# Altium PCB Main.PcbDoc
Units mm, origin at the board's own origin, x right, y up, seen from the top; angles counter-clockwise.
Board outline 98 x 90 mm, 2 copper layers (Top Layer, Bottom Layer); 6 components, 40 nets, 101 pads, 12 vias.
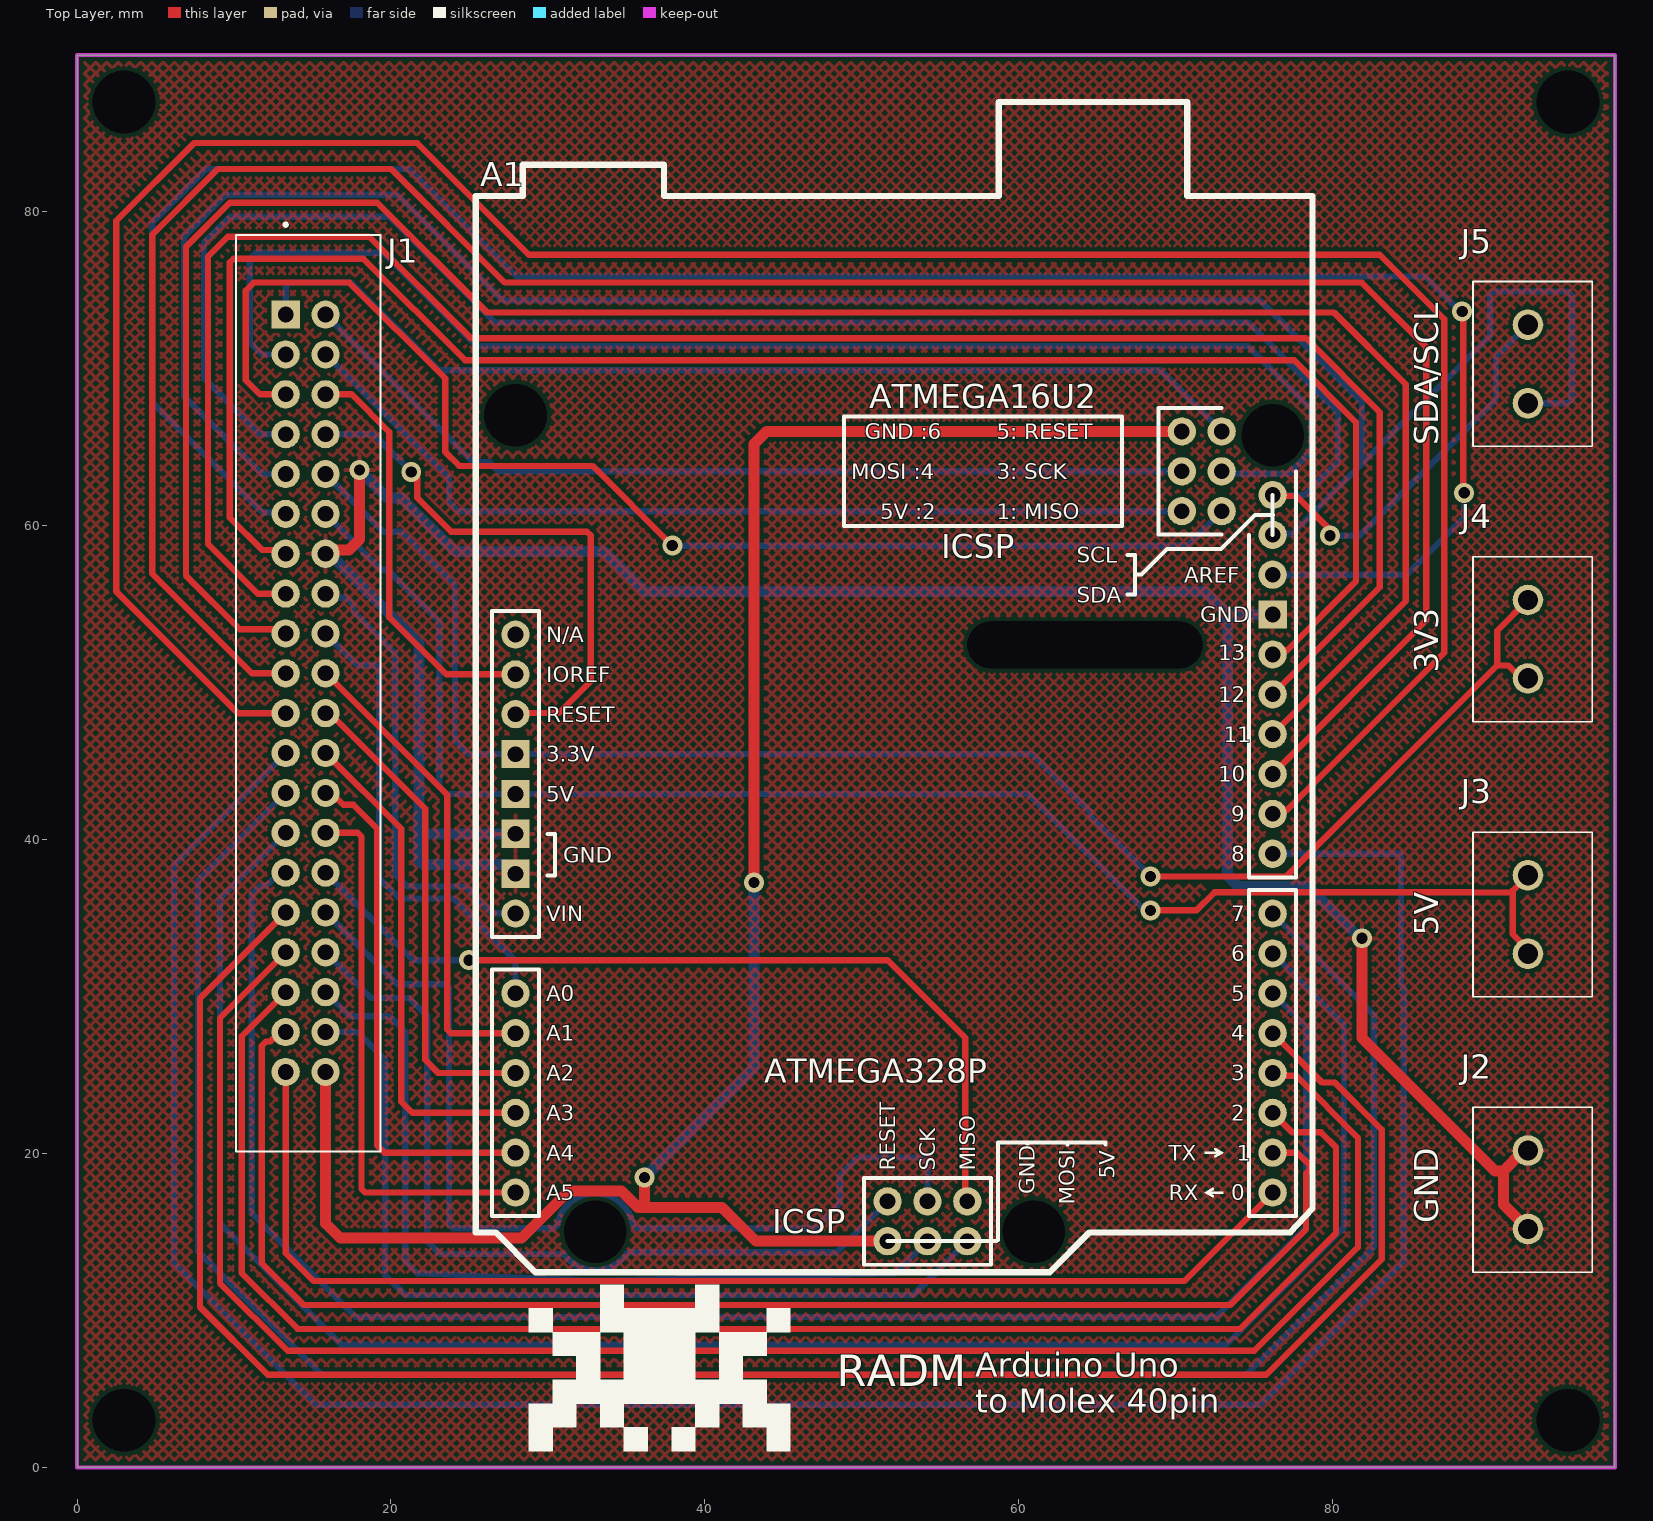
[diagram p0: Top Layer view]
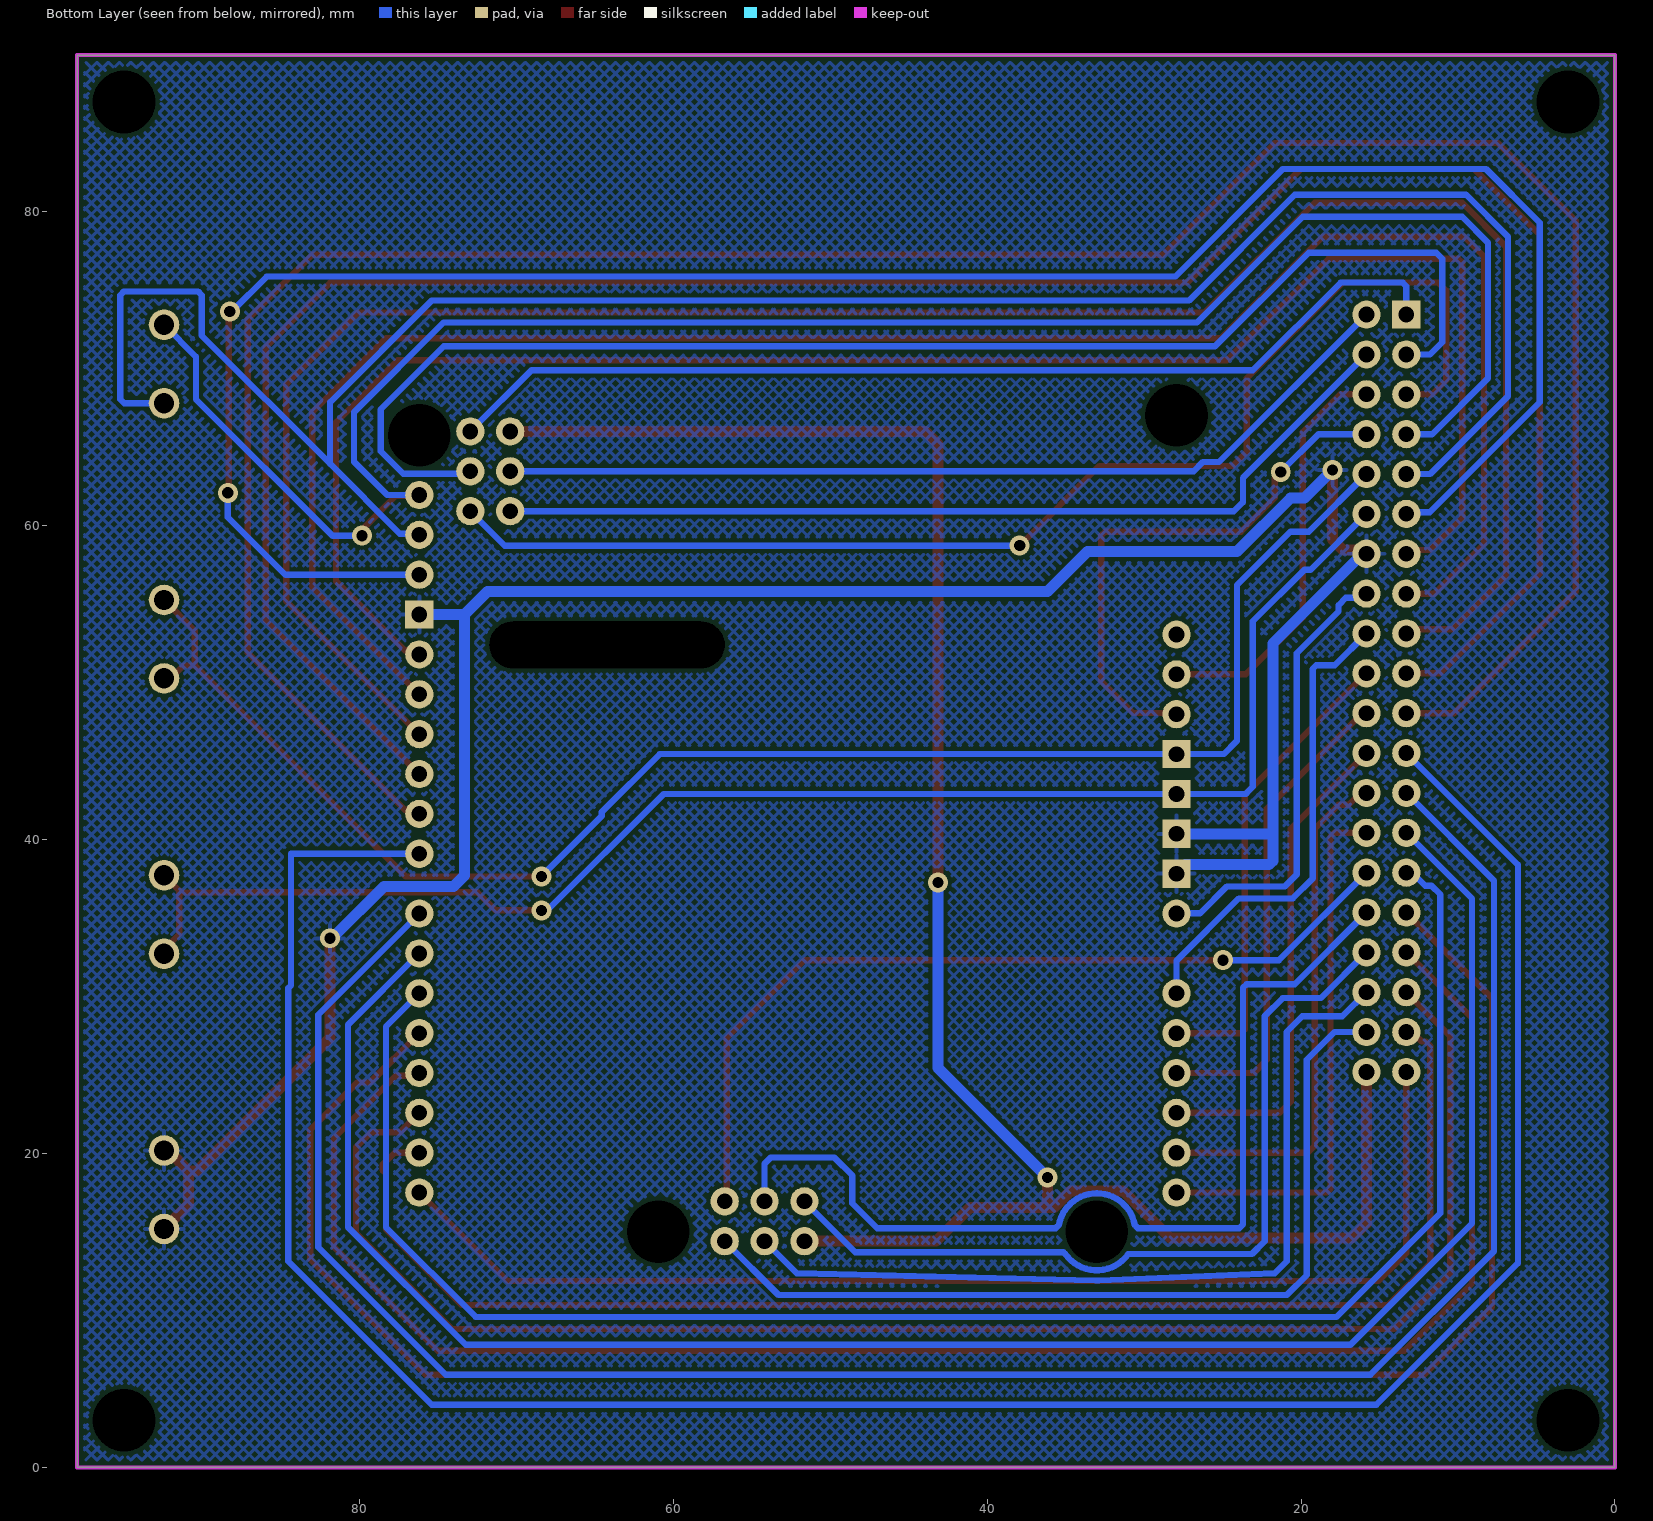
[diagram p1: Bottom Layer view, seen from below]

## Layer stack, top to bottom
Top Solder: solder mask 0.0102, Solder Resist, Dk 3.5
Top Layer: signal copper 0.0356
Dielectric 1: dielectric 0.32, FR-4, Dk 4.8
Bottom Layer: signal copper 0.0356
Bottom Solder: solder mask 0.0102, Solder Resist, Dk 3.5

## Board outline
0,0 98,0 98,90 0,90

## Design rules (kind name [scope] priority, off if disabled: settings)
Clearance [All] p1: gap=0.254 ignorepadtopadclearanceinfootprint=FALSE except(0: Arc-Hole Track-Hole SMDPad-Hole THPad-Hole Via-Hole Fill-Hole Poly-Hole Region-Hole Text-Hole)
PolygonConnect [All] p1: connectstyle=Relief reliefconductorwidth=0.254 reliefentries=4 polygonreliefangle="90 Angle" airgapwidth=0.254
RoutingVias [All] p1: holewidth=0.711 width=1.27 viastyle="Through Hole" minholewidth=0.711 minwidth=1.27 maxholewidth=0.711 maxwidth=1.27
SolderMaskExpansion [All] p1: expansion=0.102 istentingtop=FALSE
Width [All] p1: maxlimit=0.8 minlimit=0.4 preferedwidth=0.4
30 further rules are at their usual default settings.

## Components (designator, comment, footprint, x,y, rotation, side; value= is the part's Value field where it differs from the comment)
A1 "Arduino Uno" "Arduino Uno" 25.399,81.014 r0 top
J1 "1-1761681-3" TE_1-1761681-3 13.295,73.461 r270 top
J2 "TB002-500-02BE" TB00250002BE 92.456,20.193 r270 top
J3 "TB002-500-02BE" TB00250002BE 92.456,37.735 r270 top
J4 "TB002-500-02BE" TB00250002BE 92.456,55.276 r270 top
J5 "TB002-500-02BE" TB00250002BE 92.456,72.818 r270 top

## Footprints (in the part's own frame and the unit in brackets; to place one, negate y for a bottom-side part, rotate by r counter-clockwise, add the part's x,y. Pads: shape width x height; smd on the part's side, far side on the other; paste and mask are expansions set on the pad)
"Arduino Uno" [mm]
  round 1.8 hole 1: 0(50.79,-63.5) 1(50.79,-60.96) 2(50.79,-58.42) 3(50.79,-55.88) 4(50.79,-53.34) 5(50.79,-50.8) 6(50.79,-48.26) 7(50.79,-45.72) 8(50.79,-41.91) 9(50.79,-39.37) 10(50.79,-36.83) 11(50.79,-34.29) 12(50.79,-31.75) 13(50.79,-29.21) 200(26.25,-66.6) 201(26.25,-64.06) 202(28.79,-66.6) 203(28.79,-64.06) 204(31.33,-66.6) 205(31.33,-64.06) 300(45,-15) 301(47.54,-15) 302(45,-17.54) 303(47.54,-17.54) 304(45,-20.08) 305(47.54,-20.08) A0(2.54,-50.8) A1(2.54,-53.34) A2(2.54,-55.88) A3(2.54,-58.42) A4(2.54,-60.96) A5(2.54,-63.5) AREF(50.79,-24.13) IOREF(2.54,-30.48) N/A(2.54,-27.94) RESET(2.54,-33.02) SCL(50.79,-19.05) SDA(50.79,-21.59) VIN(2.54,-45.72)
  rect 1.8x1.8 hole 1: 3V3(2.54,-35.56) 5V(2.54,-38.1) GND1(2.54,-40.64) GND2(2.54,-43.18) GND3(50.79,-26.67)
  round 1.524 hole 4 unplated: 211(2.54,-13.97) 211(7.62,-66) 211(35.56,-66) 211(50.8,-15.24)
  oval 14x1.524 hole 3 slot 15 at 0 deg unplated: LED(38.83,-28.6)
  silkscreen extent 0,-68.58 53.33,6
TB00250002BE [mm]
  round 1.95 hole 1.3: 1(0,0) 2(5,0)
  silkscreen extent -2.75,-3.5 7.75,4.1, body extent -2.51,-4.08 7.99,3.52, height 9.99
TE_1-1761681-3 [mm]
  rect 1.8x1.8 hole 1: 1(0,0)
  round 1.8 hole 1: 2(0,2.54) 3(2.54,0) 4(2.54,2.54) 5(5.08,0) 6(5.08,2.54) 7(7.62,0) 8(7.62,2.54) 9(10.16,0) 10(10.16,2.54) 11(12.7,0) 12(12.7,2.54) 13(15.24,0) 14(15.24,2.54) 15(17.78,0) 16(17.78,2.54) 17(20.32,0) 18(20.32,2.54) 19(22.86,0) 20(22.86,2.54) 21(25.4,0) 22(25.4,2.54) 23(27.94,0) 24(27.94,2.54) 25(30.48,0) 26(30.48,2.54) 27(33.02,0) 28(33.02,2.54) 29(35.56,0) 30(35.56,2.54) 31(38.1,0) 32(38.1,2.54) 33(40.64,0) 34(40.64,2.54) 35(43.18,0) 36(43.18,2.54) 37(45.72,0) 38(45.72,2.54) 39(48.26,0) 40(48.26,2.54)
  silkscreen extent -5.83,-3.18 53.34,6.04

## Part data
J1: "40 Pin Connector", Package=None, Availability=Unavailable, MP=1-1761681-3, Price=None
J2 J3 J4 J5: "Connector", Manufacturer_Name="CUI Devices", Mouser Part Number=490-TB002-500-02BE, Arrow Part Number=TB002-500-02BE, Arrow Price/Stock=https://www.arrow.com/en/products/tb002-500-02be/cui-devices?region=nac, Datasheet Link=https://eu.mouser.com/datasheet/2/670/tb002_500-1550579.pdf, Height=10.4mm, Manufacturer_Part_Number=TB002-500-02BE, Mouser Price/Stock=https://www.mouser.co.uk/ProductDetail/CUI-Devices/TB002-500-02BE?qs=vLWxofP3U2x9716kcgva%2Fw%3D%3D

## Free pads (board coordinates)
  round 1.524 hole 4 unplated: 2(3,3) 2(3,87) 2(95,3) 2(95,87)

## Via types
v1: diameter 1.27, hole 0.711, Top Layer to Bottom Layer, 12 vias

## Nets (pads, with @x,y where several pads share a name; then routed paths per layer and width w, separated by ;. In a path a pad name is that pad's centre, name@x,y a point inside that pad or via, vN(x,y) a via of type N, cw(c..) or ccw(c..) an arc to the next point about the centre after c; other vN are vias at no path point)
0: A1.0 J1.39 | length 77.5
  Top Layer w0.4: J1.39 13.295,13.652 15.073,11.874 70.549,11.874 A1.0
1: A1.1 J1.37 | length 92.2
  Top Layer w0.4: J1.37 12.916,27.741 12.318,27.143 12.054,27.143 11.771,26.86 11.771,13.017 14.438,10.35 73.493,10.35 78.319,15.176 78.319,18.732 78.534,18.947 78.534,19.279 77.759,20.054 A1.1
2: A1.2 J1.35 | length 103.2
  Top Layer w0.4: J1.35 10.501,27.487 10.501,12.382 14.057,8.826 74.128,8.826 80.224,14.922 80.224,20.403 79.262,21.364 77.419,21.364 A1.2
3: A1.3 J1.33 | length 114
  Top Layer w0.4: J1.33 9.104,28.63 9.104,11.747 13.422,7.429 75.017,7.429 81.621,14.033 81.621,21.018 77.689,24.95 76.373,24.95 A1.3
3V3: A1.3V3 J1.10 J4.1 J4.2 | length 104.1
  Top Layer w0.4: v1(68.413,37.655) 77.049,37.655 90.499,51.105 ; J4.2 92.037,50.276 91.207,51.105 90.499,51.105 ; J4.1 90.499,53.32 90.499,51.105
  Bottom Layer w0.4: J1.10 19.511,59.625 20.682,59.625 24.09,56.217 24.09,46.291 24.927,45.454 A1.3V3 60.868,45.454 64.557,41.765 64.557,41.511 v1(68.413,37.655)
4: A1.4 J1.31 | length 125.2
  Top Layer w0.4: 12.152,5.905 7.834,10.223 7.834,29.9 J1.31 ; 12.251,5.905 75.779,5.905 83.145,13.271 83.145,21.526 80.141,24.53 79.333,24.53 A1.4
5: A1.5 J1.29 | length 111.1
  Bottom Layer w0.4: J1.29 12.916,37.901 12.083,37.067 11.691,37.067 11.136,36.512 11.136,16.192 17.74,9.588 72.604,9.588 78.319,15.303 78.319,28.084 A1.5
5V: A1.5V J1.12 J3.1 J3.2 | length 98.5
  Top Layer w0.4: v1(68.413,35.496) 71.334,35.496 72.486,36.648 88.851,36.648 88.86,36.639 91.48,36.639 ; J3.2 92.456,33.01 91.48,33.986 91.48,36.639 ; J3.1 91.48,36.759 91.48,36.639
  Bottom Layer w0.4: J1.12@15.843,60.761 J1.12 19.394,57.202 19.783,57.202 23.074,53.911 23.074,43.37 23.329,43.115 23.53,42.914 A1.5V 60.614,42.914 v1@68.223,35.305
6: A1.6 J1.27 | length 123.9
  Bottom Layer w0.4: J1.27 9.104,36.25 9.104,15.557 16.851,7.81 73.239,7.81 80.732,15.303 80.732,28.211 A1.6
7: A1.7 J1.25 | length 137
  Bottom Layer w0.4: J1.25 7.707,37.393 7.707,13.779 15.581,5.905 74.509,5.905 82.637,14.033 82.637,28.846 A1.7
8: A1.8 J1.23 | length 155.7
  Bottom Layer w0.4: J1.23 6.183,38.409 6.183,13.017 15.2,4 75.398,4 84.542,13.144 84.542,30.543 84.363,30.722 84.363,39.104 A1.8 A1.8@76.189,38.896
9: A1.9 J1.21 | length 165.4
  Top Layer w0.4: J1.21 10.255,48.061 2.5,55.816 2.5,79.438 7.453,84.391 21.677,84.391 28.789,77.279 83.018,77.279 87.122,73.175 87.122,51.919 85.177,49.974 77.115,41.912 76.457,41.912 A1.9
10: A1.10 J1.19 | length 151.6
  Top Layer w0.4: J1.19 11.144,50.601 4.786,56.959 4.786,78.549 8.977,82.74 20.026,82.74 27.265,75.501 81.875,75.501 85.979,71.397 85.979,53.974 A1.10
11: A1.11 J1.17 | length 138.3
  Top Layer w0.4: J1.17 13.033,53.403 10.374,53.403 6.945,56.832 6.945,77.787 9.739,80.581 19.137,80.581 26.122,73.596 80.097,73.596 84.669,69.024 84.669,55.204 A1.11
12: A1.12 J1.15 | length 125.2
  Top Layer w0.4: J1.15 11.525,55.681 8.342,58.864 8.342,77.152 9.612,78.422 18.629,78.422 25.106,71.945 78.319,71.945 83.018,67.246 83.018,56.093 A1.12
13: A1.13 J1.13 | length 114.3
  Top Layer w0.4: J1.13 13.057,58.459 11.795,58.459 9.739,60.515 9.739,76.791 9.973,77.025 18.248,77.025 24.725,70.548 77.557,70.548 81.494,66.611 81.494,56.451 77.115,52.072 76.457,52.072 A1.13
201: A1.201 J1.34 | length 54.3
  Bottom Layer w0.4: J1.34 18.748,29.908 21.169,29.908 22.312,28.765 22.312,14.414 23.127,13.599 31.008,13.599 31.03,13.577 ccw(c33.019,15.014) 35.008,13.577 35.03,13.599 35.147,13.716 48.411,13.716 A1.201
202: A1.202 J1.36 | length 55.2
  Bottom Layer w0.4: J1.36 17.37,28.746 19.918,28.746 20.915,27.749 20.915,13.144 21.687,12.372 32.891,11.909 ccw(c33.019,15.014) 33.095,11.907 52.147,12.372 A1.202
203: A1.203 J1.32 | length 63.2
  Bottom Layer w0.4: J1.32 20.399,30.797 23.475,30.797 23.709,30.563 23.709,15.474 23.826,15.357 23.943,15.24 30.4,15.24 30.517,15.357 30.603,15.443 cw(c33.019,15.014) 35.435,15.443 35.521,15.357 35.638,15.24 47.014,15.24 48.601,16.827 48.601,18.605 49.744,19.748 53.808,19.748 54.189,19.367 A1.203
204: A1.204 J1.38 | length 57.3
  Bottom Layer w0.4: J1.38 17.875,27.741 19.645,25.971 19.645,12.255 20.915,10.985 53.3,10.985 A1.204
205: A1.205 J1.30 | length 55.6
  Top Layer w0.4: v1(24.979,32.321) 51.649,32.321 56.602,27.368 56.602,17.081 A1.205
  Bottom Layer w0.4: J1.30 21.415,32.321 v1(24.979,32.321)
301: A1.301 J1.1 | length 65.5
  Bottom Layer w0.4: J1.1 13.295,75.267 13.529,75.501 17.486,75.501 23.074,69.913 69.04,69.913 A1.301
302: A1.302 J1.2 | length 58.7
  Bottom Layer w0.4: J1.2 25.225,64.071 26.249,64.071 26.846,63.474 A1.302
303: A1.303 J1.3 | length 88.9
  Bottom Layer w0.4: J1.3 11.779,70.921 11.009,71.691 11.009,77.025 11.39,77.406 19.518,77.406 25.487,71.437 74.636,71.437 78.653,67.42 78.653,64.758 77.215,63.32 73.093,63.32 A1.303
304: A1.304 J1.4 | length 59.6
  Bottom Layer w0.4: J1.4 23.709,63.047 23.709,61.511 24.286,60.934 A1.304
305: A1.305 J1.5 | length 81.6
  Top Layer w0.4: J1.5 11.652,68.381 10.755,69.278 10.755,74.993 11.263,75.501 17.359,75.501 23.455,69.405 23.455,64.706 24.344,63.817 32.853,63.817 v1(37.933,58.737)
  Bottom Layer w0.4: v1(37.933,58.737) 70.742,58.737 A1.305
A0: A1.A0 J1.18 | length 30.6
  Bottom Layer w0.4: J1.18 17.859,51.117 19.03,51.117 19.264,50.883 19.264,37.528 20.534,36.258 23.963,36.258 27.939,32.282 A1.A0
A1: A1.A1 J1.20 | length 30.4
  Top Layer w0.4: J1.20 15.843,50.601 23.582,42.862 23.582,27.908 23.816,27.674 A1.A1
A2: A1.A2 J1.22 | length 31
  Top Layer w0.4: J1.22 16.097,48.061 22.185,41.973 22.185,25.971 23.022,25.134 A1.A2
A3: A1.A3 J1.24 | length 31.8
  Top Layer w0.4: J1.24 20.661,40.695 20.661,23.304 21.371,22.594 A1.A3
A4: A1.A4 J1.26 | length 33.4
  Top Layer w0.4: J1.26 16.214,42.981 16.968,42.227 17.613,42.227 19.137,40.703 19.137,20.51 19.593,20.054 A1.A4
A5: A1.A5 J1.28 | length 34.8
  Top Layer w0.4: J1.28 17.887,40.441 18.121,40.206 18.121,17.748 18.355,17.514 A1.A5
AREF: A1.AREF J1.11 | length 138.4
  Top Layer w0.4: v1(88.265,73.66) 88.328,73.596 88.328,62.166 v1(88.392,62.103)
  Bottom Layer w0.4: J1.11 13.184,60.872 11.795,60.872 4.786,67.881 4.786,79.311 8.215,82.74 21.169,82.74 28.027,75.882 85.916,75.882 88.138,73.66 v1(88.265,73.66) ; A1.AREF 84.721,56.884 88.392,60.555 v1(88.392,62.103)
GND: A1.GND1 A1.GND2 A1.GND3 J1.14 J2.1 J2.2 | length 155.7
  Top Layer w0.4: J1.14 J1.14@16.073,58.459
  Top Layer w0.7: J1.14@16.073,58.459 17.335,58.459 17.994,59.118 v1(17.994,63.563) ; v1(81.875,33.718) 81.875,27.368 90.345,18.898 90.888,18.898 ; J2.2 90.888,16.761 90.888,18.898 ; J2.1 92.183,20.193 90.888,18.898
  Bottom Layer w0.4: J1.14 J1.14@16.097,58.221 ; 21.804,40.449 21.879,40.374 ; A1.GND2@27.356,38.417 A1.GND2
  Bottom Layer w0.7: J1.14@16.097,58.221 21.804,52.514 21.804,40.449 21.804,38.651 22.038,38.417 A1.GND2@27.356,38.417 ; v1(17.994,63.563) 19.772,61.785 20.661,61.785 24.09,58.356 33.615,58.356 36.155,55.816 71.842,55.816 73.314,54.344 ; 21.879,40.374 A1.GND1 ; A1.GND3 73.314,54.344 ; v1@81.621,33.845 78.446,37.02 74.001,37.02 73.314,37.707 73.314,54.344
"ICSP GND": A1.200 A1.300 J1.40 | length 127.7
  Top Layer w0.4: A1.200@51.522,14.541 A1.200
  Top Layer w0.7: J1.40 15.835,15.557 16.787,14.605 28.321,14.605 31.334,17.618 34.706,17.618 35.751,16.573 36.155,16.573 ; v1(36.155,18.478) 36.155,16.573 ; v1(43.14,37.274) 43.14,65.214 43.94,66.014 A1.300 ; A1.200 43.267,14.414 41.108,16.573 36.155,16.573
  Bottom Layer w0.7: v1(36.155,18.478) 43.14,25.463 v1(43.14,37.274)
IOREF: A1.IOREF J1.6 | length 26.4
  Top Layer w0.4: J1.6 17.494,68.381 19.899,65.976 19.899,54.165 23.53,50.534 A1.IOREF
RESET: A1.RESET J1.8 | length 35.3
  Top Layer w0.4: v1(21.296,63.436) 21.677,63.055 21.677,61.785 23.836,59.626 32.492,59.626 32.726,59.392 32.726,50.101 30.694,48.069 A1.RESET@28.014,48.069
  Bottom Layer w0.4: J1.8 18.891,65.841 v1(21.296,63.436) ; A1.RESET A1.RESET@28.014,48.069
SCL: A1.SCL J1.7 J5.1 | length 126.4
  Top Layer w0.4: A1.SCL 76.246,61.907 77.689,61.907 79.843,59.753 v1(79.843,59.372)
  Bottom Layer w0.4: J1.7 11.652,65.841 8.088,69.405 8.088,78.041 9.739,79.692 19.899,79.692 26.63,72.961 74.636,72.961 80.351,67.246 80.351,64.071 78.244,61.964 A1.SCL ; v1(79.843,59.372) 81.724,59.372 90.424,68.072 90.424,70.786 J5.1
SDA: A1.SDA J1.9 J5.2 | length 140.9
  Bottom Layer w0.4: J1.9 11.779,63.301 6.818,68.262 6.818,78.422 9.485,81.089 20.407,81.089 27.138,74.358 75.398,74.358 81.875,67.881 81.875,63.944 ; A1.SDA 76.267,59.502 77.433,59.502 81.875,63.944 ; J5.2 94.996,67.818 95.25,68.072 95.25,74.696 95.016,74.93 90.289,74.93 90.055,74.696 90.055,72.124 81.875,63.944
VIN: A1.VIN J1.16 | length 29
  Bottom Layer w0.4: J1.16 16.103,55.413 17.147,55.413 17.613,54.947 17.613,54.546 20.28,51.879 20.28,37.782 21.042,37.02 24.725,37.02 26.439,35.306 27.927,35.306 A1.VIN
pads on no net: A1.211 A1.LED A1.N/A

## Polygon pours and split planes (outlines as drawn)
GND on Top Layer "GND_L01_P000" (hatched 45Degree grid 0.508 track 0.203, pour order 0): 0,0 98,0 98,90 0,90
GND on Bottom Layer "GND_L02_P003" (hatched 45Degree grid 0.508 track 0.203, pour order 3): 0,0 98,0 98,90 0,90

## Keep-outs
Keep-Out Layer:
  the board outline again, w0.254

## Silkscreen, mask and mechanical layers (free items; w line width, h text height)
Top Overlay:
  region: 33.338,8.963 33.338,11.647 34.853,11.647 34.853,10.131 39.4,10.131 39.4,11.647 40.916,11.647 40.916,8.616 39.4,8.616 39.4,5.584 40.916,5.584 40.916,8.616 43.947,8.616 43.947,7.1 42.431,7.1 42.431,5.584 43.947,5.584 43.947,4.069 45.462,4.069 45.462,1.038 43.947,1.038 43.947,2.553 42.431,2.553 42.431,4.069 40.916,4.069 40.916,2.553 39.4,2.553 39.4,4.069 34.853,4.069 34.853,2.553 33.338,2.553 33.338,4.069 31.822,4.069 31.822,2.553 30.307,2.553 30.307,1.038 28.791,1.038 28.791,4.069 30.307,4.069 30.307,5.584 31.822,5.584 31.822,7.1 30.307,7.1 30.307,8.616 33.338,8.616 33.338,5.584 34.853,5.584 34.853,8.616 33.338,8.616 33.338,8.947
  region: 35.453,2.553 36.369,2.553 36.369,1.038 34.853,1.038 34.853,2.553 35.438,2.553
  region: 39.4,2.348 39.4,1.038 37.884,1.038 37.884,2.553 39.4,2.553 39.4,2.364
  region: 44.168,8.616 43.947,8.616 43.947,10.131 45.462,10.131 45.462,8.616 44.183,8.616
  region: 30.291,8.616 28.791,8.616 28.791,10.131 30.307,10.131 30.307,8.616
  text "SDA/SCL" at 86.741,65.145 h1.52 r90
  text "3V3" at 86.741,50.65 h1.52 r90
  text "5V" at 86.741,33.87 h1.52 r90
  text "GND" at 86.741,15.567 h1.52 r90
  text "RADM" at 48.399,5.174 h2
  text "Arduino Uno / to Molex 40pin" at 57.251,3.486 h1.52

## Text inside footprints (layer, text, board x,y; h text height)
A1: Top Overlay "AREF" at 70.564,56.384 h1; Top Overlay "GND" at 71.563,53.844 h1; Top Overlay "13" at 72.729,51.431 h1; Top Overlay "12" at 72.729,48.764 h1; Top Overlay "11" at 73.063,46.224 h1; Top Overlay "10" at 72.729,43.684 h1; Top Overlay "9" at 73.563,41.144 h1; Top Overlay "8" at 73.563,38.604 h1; Top Overlay "1: MISO" at 58.619,60.434 h1; Top Overlay "5V :2" at 51.18,60.434 h1; Top Overlay "3: SCK" at 58.619,62.974 h1; Top Overlay "MOSI :4" at 49.348,62.974 h1; Top Overlay "5: RESET" at 58.619,65.514 h1; Top Overlay "GND :6" at 50.181,65.514 h1; Top Overlay "ATMEGA16U2" at 50.496,67.488 h1.52; Top Overlay "ICSP" at 55.066,57.936 h1.52; Top Overlay "GND" at 30.969,38.544 h1; Top Overlay "A5" at 29.899,17.014 h1; Top Overlay "A4" at 29.899,19.554 h1; Top Overlay "A3" at 29.899,22.094 h1; Top Overlay "A2" at 29.899,24.634 h1; Top Overlay "A0" at 29.899,29.714 h1; Top Overlay "VIN" at 29.899,34.794 h1; Top Overlay "5V" at 29.899,42.414 h1; Top Overlay "3.3V" at 29.899,44.954 h1; Top Overlay "RESET" at 29.899,47.494 h1; Top Overlay "IOREF" at 29.899,50.034 h1; Top Overlay "N/A" at 29.899,52.574 h1; Top Overlay "SCL" at 63.69,57.654 h1; Top Overlay "SDA" at 63.69,55.114 h1; Top Overlay "0" at 73.563,17.014 h1; Top Overlay "1" at 73.896,19.554 h1; Top Overlay "2" at 73.563,22.094 h1; Top Overlay "3" at 73.563,24.634 h1; Top Overlay "4" at 73.563,27.174 h1; Top Overlay "5" at 73.563,29.714 h1; Top Overlay "6" at 73.563,32.254 h1; Top Overlay "7" at 73.563,34.794 h1; Top Overlay "TX" at 69.563,19.554 h1; Top Overlay "RX" at 69.563,17.014 h1; Top Overlay "ATMEGA328P" at 43.775,24.499 h1.52; Top Overlay "ICSP" at 44.303,14.922 h1.52; Top Overlay "MISO" at 57.229,18.914 h1 r90; Top Overlay "SCK" at 54.689,18.914 h1 r90; Top Overlay "RESET" at 52.149,18.914 h1 r90; Top Overlay "5V" at 66.119,18.408 h1 r90; Top Overlay "MOSI" at 63.579,16.742 h1 r90; Top Overlay "GND" at 61.039,17.409 h1 r90